# Altium PCB MiniRobot.PcbDoc
Units mil, origin at the board's own origin, x right, y up, seen from the top; angles counter-clockwise.
Board outline 3543.31 x 3346.46 mil, 2 copper layers (Top Layer, Bottom Layer); 51 components, 46 nets, 189 pads, 4 vias.
Unrouted connection lines stored in the file: 105.
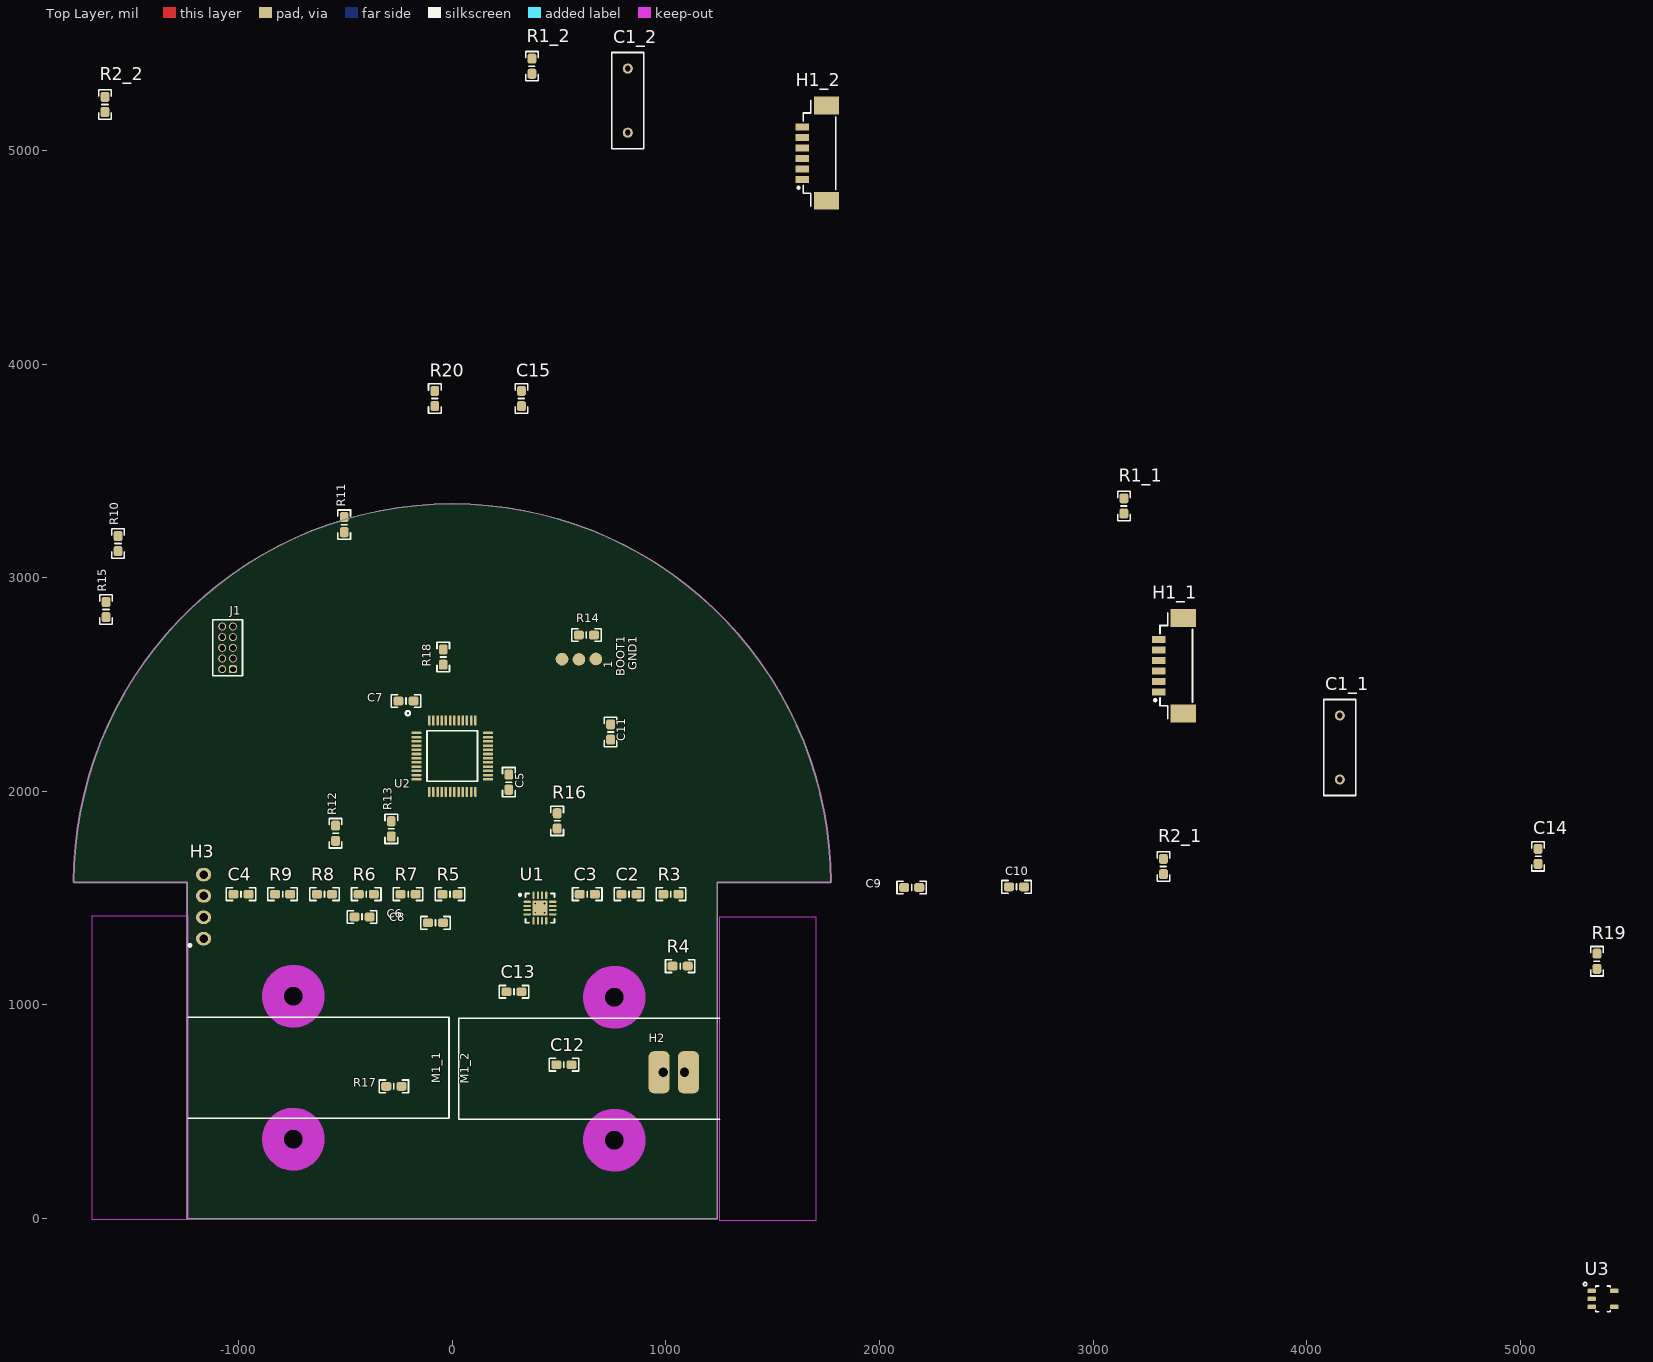
[diagram p0: Top Layer view]
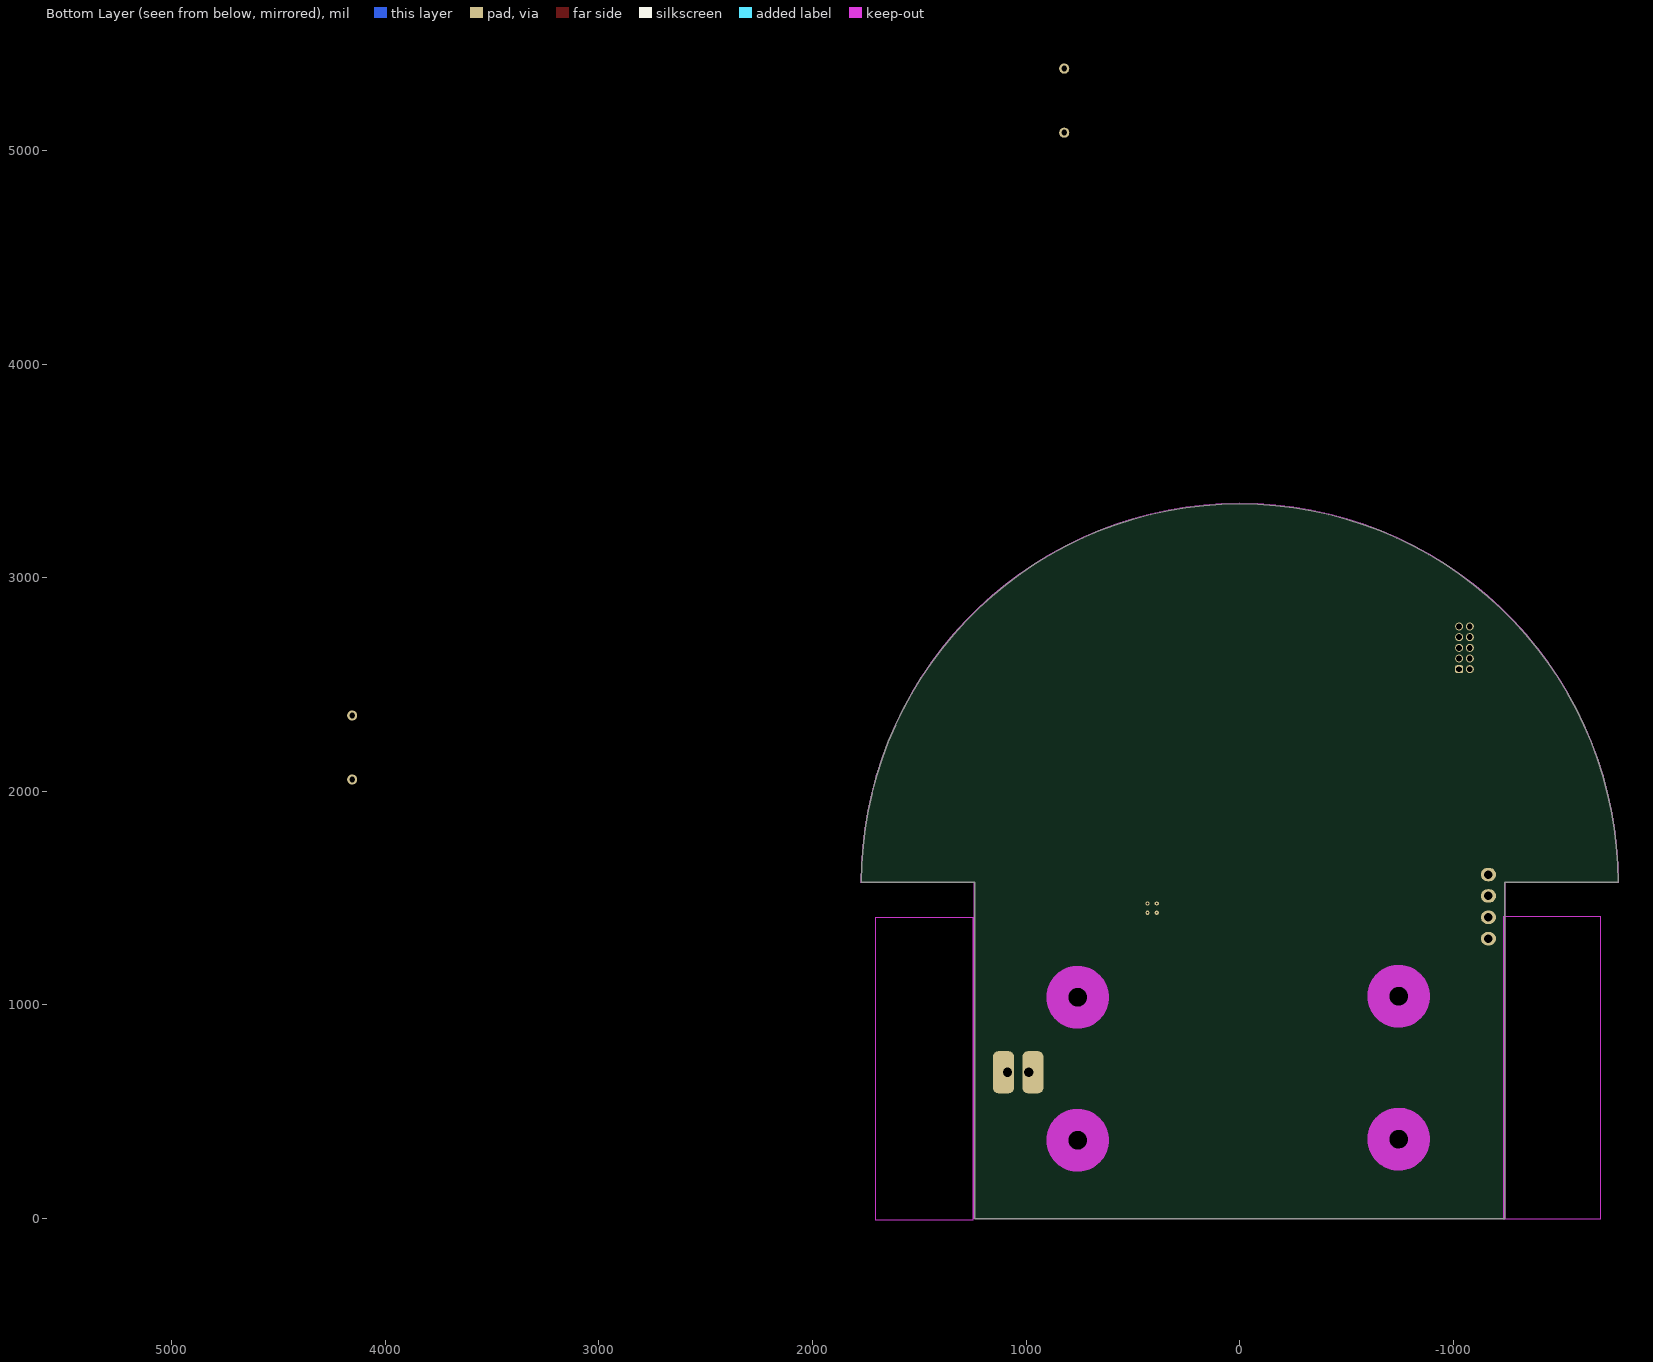
[diagram p1: Bottom Layer view, seen from below]

## Layer stack, top to bottom
Top Solder: solder mask 0.4, Solder Resist, Dk 3.5
Top Layer: signal copper 1.4
Dielectric 1: dielectric 12.6, FR-4, Dk 4.8
Bottom Layer: signal copper 1.4
Bottom Solder: solder mask 0.4, Solder Resist, Dk 3.5

## Board outline
1771.65,1574.8 1769.65,1659.1 1763.63,1743.21 1753.62,1826.94 1739.64,1910.09 1721.71,1992.49 1699.89,2073.94 1674.21,2154.25 1644.75,2233.26 1611.55,2310.77 1574.71,2386.62 1534.3,2460.63 1490.41,2532.63 1443.15,2602.46 1392.61,2669.97 1338.93,2734.99 1282.21,2797.38 1222.58,2857.01 1160.19,2913.73 1095.16,2967.42 1027.66,3017.95 957.83,3065.21 885.83,3109.1 811.82,3149.51 735.97,3186.36 658.46,3219.55 579.45,3249.02 499.13,3274.69 417.68,3296.52 335.29,3314.44 252.13,3328.42 168.41,3338.43 84.3,3344.45 0,3346.46 -84.3,3344.45 -168.41,3338.43 -252.13,3328.42 -335.29,3314.44 -417.68,3296.52 -499.13,3274.69 -579.45,3249.02 -658.46,3219.55 -735.97,3186.36 -811.82,3149.51 -885.83,3109.1 -957.83,3065.21 -1027.66,3017.95 -1095.16,2967.42 -1160.19,2913.73 -1222.58,2857.01 -1282.21,2797.38 -1338.93,2734.99 -1392.61,2669.97 -1443.15,2602.46 -1490.41,2532.63 -1534.3,2460.63 -1574.71,2386.62 -1611.55,2310.77 -1644.75,2233.26 -1674.21,2154.25 -1699.89,2073.94 -1721.71,1992.49 -1739.64,1910.09 -1753.62,1826.94 -1763.63,1743.21 -1769.65,1659.1 -1771.65,1574.8 -1240.16,1574.8 -1240.16,0 1240.16,0 1240.16,1574.8

## Design rules (kind name [scope] priority, off if disabled: settings)
Clearance [All] p1: gap=4.92
ComponentClearance [All] p1 off: gap=10 collisioncheckmode=3 verticalgap=10 showdistances=FALSE
HoleSize [All] p1: absolutevalues=TRUE maxlimit=393.7 minlimit=7.48 maxpercent=80.000 minpercent=20.000
MinimumAnnularRing [All] p1: minimumring=3.01
MinimumSolderMaskSliver [All] p1: minsoldermaskwidth=6.06
PolygonConnect [All] p1: connectstyle=Relief reliefconductorwidth=10 reliefentries=4 polygonreliefangle="45 Angle" airgapwidth=10
RoomDefinition U_MR_UartConnector [InComponentClass('U_MR_UartConnector')] p1: confinementstyle=ConfineIn formatcopy=TRUE lockcomponents=FALSE outline -121.06,3505.89 465.58,3505.89 465.58,4017.73 -121.06,4017.73
RoomDefinition U_MR_Power [InComponentClass('U_MR_Power')] p2: confinementstyle=ConfineIn formatcopy=TRUE lockcomponents=FALSE outline 4895.65,-445.87 5470.48,-445.87 5470.48,-189.95 4895.65,-189.95
RoomDefinition U_MR_Motor_Control [InComponentClass('U_MR_Motor_Control')] p3: confinementstyle=ConfineIn formatcopy=TRUE lockcomponents=FALSE outline -1067.95,1349.4 1102.44,1349.4 1102.44,1657.49 -1067.95,1657.49
RoutingVias [All] p1: holewidth=9.84 width=23.62 viastyle="Through Hole" minholewidth=7.87 minwidth=17.72 maxholewidth=39.37 maxwidth=78.74
SilkToSilkClearance [All] p1: silktosilkclearance=6.06
SilkToSolderMaskClearance [IsPad] p1: minsilkscreentomaskgap=0 clearancetoexposedcopper=TRUE
SolderMaskExpansion SolderMask_Via [IsVia] p1: expansion=-3937.01
SolderMaskExpansion [All] p2: expansion=4
Width [All] p1: maxlimit=393.7 minlimit=2.95 preferedwidth=7.87 minimp=50.000000 maximp=50.000000 favimp=50.000000
24 further rules are at their usual default settings.

## Classes and differential pairs
channel class MR_Motor: LeftMotor RightMotor
component class U_MR_Power: C9 C10 H2 U3
component class RightMotor: C1_2 H1_2 M1_2 R1_2 R2_2
component class LeftMotor: C1_1 H1_1 M1_1 R1_1 R2_1
component class U_MR_Mcu: 1 BOOT1 C5 C6 C7 C8 C9 C10 C11 GND1 J1 R10 R11 R13 R14 R15 R17 R18 R19 U3
component class U_MR_Motor_Control: C2 C3 C4 R3 R4 R5 R6 R7 R8 R9 U1
component class U_MR_RangeSensor: C14 R19
component class U_MR_UartConnector: C15 H2 R20

## Components (designator, comment, footprint, x,y, rotation, side; value= is the part's Value field where it differs from the comment)
1 "TestPoint" ROUND_TEST_POINT 513.78,2619.09 r180 top
BOOT1 "TestPoint" ROUND_TEST_POINT 593.01,2618.11 r270 top
C1_1 "0603" RAD-0.3 4155.51,2205.71 r90 top (schematic designator C1)
C1_2 "0603" RAD-0.3 821.85,5234.25 r90 top (schematic designator C1)
C2 "CerCap" 0603_CAP_LD 827.82,1518.7 r0 top
C3 "CerCap" 0603_CAP_LD 631.94,1518.7 r0 top
C4 "CerCap" 0603_CAP_LD -989.2,1518.7 r0 top
C5 "CerCap" 0603_CAP_LD 264.76,2043.31 r270 top
C6 "CerCap" 0603_CAP_LD -422.24,1412.4 r180 top
C7 "CerCap" 0603_CAP_LD -216.54,2423.23 r0 top
C8 "CerCap" 0603_CAP_LD -78.74,1384.84 r0 top
C9 "CerCap" 0603_CAP_LD 2150.89,1550.12 r0 top
C10 "CerCap" 0603_CAP_LD 2641.71,1553.15 r180 top
C11 "CerCap" 0603_CAP_LD 741.14,2278.54 r270 top
C12 "CerCap" 0603_CAP_LD 522.64,720.47 r0 top
C13 "CerCap" 0603_CAP_LD 289.37,1062.01 r0 top
C14 "CerCap" 0603_CAP_LD 5083.66,1695.87 r90 top
C15 "CerCap" 0603_CAP_LD 323.84,3839.57 r90 top
GND1 "TestPoint" ROUND_TEST_POINT 672.24,2620.08 r90 top
H1_1 "Header" HEADER_1X6_PICOBLADE_653106124022 3389.76,2588.58 r90 top (schematic designator H1)
H1_2 "Header" HEADER_1X6_PICOBLADE_653106124022 1719.49,4988.19 r90 top (schematic designator H1)
H2 "CustomBatteryConnector" CUSTOMBATTERYCONNECTOR 1037.4,685.04 r0 top
H3 "Header" "HE14 1x4 Straight" -1164.37,1460.63 r90 top
J1 "Debug" 62201021121 -1052.17,2672.24 r90 top
M1_1 "MotorGroup" MOTORGROUP -15.66,706.47 r0 top locked (schematic designator M1)
M1_2 "MotorGroup" MOTORGROUP 30.6,701.52 r180 top locked (schematic designator M1)
R1_1 "Resistor" 0603_RES_LD 3144.68,3336.61 r90 top (schematic designator R1)
R1_2 "Resistor" 0603_RES_LD 373.03,5395.67 r90 top (schematic designator R1)
R2_1 "Resistor" 0603_RES_LD 3329.72,1648.62 r90 top (schematic designator R2)
R2_2 "Resistor" 0603_RES_LD -1625.98,5216.54 r90 top (schematic designator R2)
R3 "Resistor" 0603_RES_LD 1023.69,1518.7 r0 top
R4 "Resistor" 0603_RES_LD 1066.93,1182.09 r0 top
R5 "Resistor" 0603_RES_LD -10.81,1518.7 r0 top
R6 "Resistor" 0603_RES_LD -402.56,1518.7 r0 top
R7 "Resistor" 0603_RES_LD -206.68,1518.7 r0 top
R8 "Resistor" 0603_RES_LD -598.43,1518.7 r0 top
R9 "Resistor" 0603_RES_LD -794.31,1518.7 r0 top
R10 "Resistor" 0603_RES_LD -1564.96,3160.43 r90 top
R11 "Resistor" 0603_RES_LD -505.91,3249.02 r90 top
R12 "Resistor" 0603_RES_LD -546.26,1804.13 r90 top
R13 "Resistor" 0603_RES_LD -285.43,1824.8 r90 top
R14 "Resistor" 0603_RES_LD 627.95,2732.28 r180 top
R15 "Resistor" 0603_RES_LD -1621.06,2851.38 r90 top
R16 "Resistor" 0603_RES_LD 491.14,1862.2 r90 top
R17 "Resistor" 0603_RES_LD -273.62,619.09 r0 top
R18 "Resistor" 0603_RES_LD -42.32,2628.94 r270 top
R19 "Resistor" 0603_RES_LD 5359.25,1204.72 r90 top
R20 "Resistor" 0603_RES_LD -81.69,3839.57 r90 top
U1 "Dual Brush Motor Driver" QFN-STSPIN240 410.47,1453.74 r0 top
U2 "Microcontroller" STM32_LQFP48 0,2165.35 r0 top
U3 "Low noise, Low Iq LDO" LP5907 5387.8,-375.98 r0 top

## Footprints (in the part's own frame and the unit in brackets; to place one, negate y for a bottom-side part, rotate by r counter-clockwise, add the part's x,y. Pads: shape width x height; smd on the part's side, far side on the other; paste and mask are expansions set on the pad)
0603_CAP_LD [mm] "0603 Capacitor Low Density"
  rrect50% 1.2x1.05 smd: 1(-0.9,0) 2(0.9,0)
  silkscreen extent -1.75,-0.75 1.75,0.75
0603_RES_LD [mm] "0603 Resistor Low Density"
  rrect50% 1.2x1.05 smd: 1(-0.9,0) 2(0.9,0)
  silkscreen extent -1.75,-0.75 1.75,0.75
62201021121 [mm] "Pin Header, pitch 1.27 mm, THT, Vertical, dual row, 10p"
  rrect50% 0.95x0.95 hole 0.7: 1(-2.54,-0.635)
  round 0.95 hole 0.7: 2(-2.54,0.635) 3(-1.27,-0.635) 4(-1.27,0.635) 5(0,-0.635) 6(0,0.635) 7(1.27,-0.635) 8(1.27,0.635) 9(2.54,-0.635) 10(2.54,0.635)
  silkscreen extent -3.32,-1.78 3.32,1.78, body extent -3.17,-1.7 3.18,1.7, height 5.33
CUSTOMBATTERYCONNECTOR [mm] "CustomBatteryConnector"
  rrect50% 2.5x5 smd paste-100: +(-1.75,0) -(1.75,0)
  rrect50% 2.5x5 smd far side paste-100: +(-1.75,0) -(1.75,0)
  round 1.5 hole 1.1 unplated paste-100: +(-1.27,0) -(1.27,0)
"HE14 1x4 Straight" [mm] "Connector HE14 Straight 1x4"
  oval 1.6x1.8 hole 1 mask+0.102: 1(-3.81,0) 2(-1.27,0) 3(1.27,0) 4(3.81,0)
  silkscreen extent -4.77,1.47 -4.45,1.78, body extent -5.08,-1.27 5.08,1.27, height 9.5
HEADER_1X6_PICOBLADE_653106124022 [mm] "1.25mm SMT Male Vertical Shrouded Header, 6p"
  rect 0.81x1.6 smd: 1(-3.125,2.07) 2(-1.875,2.07) 3(-0.625,2.07) 4(0.625,2.07) 5(1.875,2.07) 6(3.125,2.07)
  rect 2.1x3 smd: ""(-5.675,-0.83) ""(5.675,-0.83)
  silkscreen extent -6.27,-1.92 6.27,2.62
LP5907 [mm] "LP5907 SOT23"
  rrect50% 1x0.55 smd mask+0.102: 1(-1.35,0.95) 2(-1.35,0) 3(-1.35,-0.95) 4(1.35,-0.95) 5(1.35,0.95)
  silkscreen extent -2.33,-1.52 0.88,1.95
MOTORGROUP [mm]
  round 0 hole 2.2 unplated paste+0 mask+0: 21(-18.5,8.5) 22(-18.5,-8.5)
  Keep-Out Layer pour cut-out: -31,-18 -31,18 -42.5,18 -42.5,-18
  Keep-Out Layer circle w2.6: c-18.5,-8.5 r2.425
  Keep-Out Layer circle w2.6: c-18.5,8.5 r2.425
  silkscreen extent -31,-6 0,6
QFN-STSPIN240 [mm] "QFN, 16-Leads, Body 3,00x3,00mm, Pitch 0,50mm, Thermal Pad 1,80x1,80mm, IPC Low Density"
  oval 0.9x0.25 smd: 1(-1.525,0.75) 2(-1.525,0.25) 3(-1.525,-0.25) 4(-1.525,-0.75) 9(1.525,-0.75) 10(1.525,-0.25) 11(1.525,0.25) 12(1.525,0.75)
  oval 0.25x0.9 smd: 5(-0.75,-1.525) 6(-0.25,-1.525) 7(0.25,-1.525) 8(0.75,-1.525) 13(0.75,1.525) 14(0.25,1.525) 15(-0.25,1.525) 16(-0.75,1.525)
  rect 1.8x1.8 smd: 17(0,0)
  silkscreen extent -2.5,-1.73 1.73,1.73
RAD-0.3 [mm] "Radial Cap, Thru-Hole; 2 Leads; 0.3 in Pin Spacing"
  round 1.2 hole 0.7: 1(-3.81,0) 2(3.81,0)
  silkscreen extent -5.71,-1.91 5.71,1.91
ROUND_TEST_POINT [mm] "Small round test point"
  round 1.5 smd paste-100: 1(0,0)
STM32_LQFP48 [mm]
  rrect50% 1.2x0.3 smd: 1(-4.25,2.75) 2(-4.25,2.25) 3(-4.25,1.75) 4(-4.25,1.25) 5(-4.25,0.75) 6(-4.25,0.25) 7(-4.25,-0.25) 8(-4.25,-0.75) 9(-4.25,-1.25) 10(-4.25,-1.75) 11(-4.25,-2.25) 12(-4.25,-2.75) 25(4.25,-2.75) 26(4.25,-2.25) 27(4.25,-1.75) 28(4.25,-1.25) 29(4.25,-0.75) 30(4.25,-0.25) 31(4.25,0.25) 32(4.25,0.75) 33(4.25,1.25) 34(4.25,1.75) 35(4.25,2.25) 36(4.25,2.75)
  rrect50% 0.3x1.2 smd: 13(-2.75,-4.25) 14(-2.25,-4.25) 15(-1.75,-4.25) 16(-1.25,-4.25) 17(-0.75,-4.25) 18(-0.25,-4.25) 19(0.25,-4.25) 20(0.75,-4.25) 21(1.25,-4.25) 22(1.75,-4.25) 23(2.25,-4.25) 24(2.75,-4.25) 37(2.75,4.25) 38(2.25,4.25) 39(1.75,4.25) 40(1.25,4.25) 41(0.75,4.25) 42(0.25,4.25) 43(-0.25,4.25) 44(-0.75,4.25) 45(-1.25,4.25) 46(-1.75,4.25) 47(-2.25,4.25) 48(-2.75,4.25)
  silkscreen extent -5.54,-3 3,5.37

## Part data
C1_1 C1_2: library part Cap, "Capacitor"
C2 C3 C4 C5 C6 C7 C8 C9 C10 C11 C12 C13 C14 C15: "Ceramic Capacitor"
H1_1 H1_2: library part Header_6x1, "Header 6x1 Pins"
H2: library part BatteryConnector, "Custom Battery Connector"
H3: library part Header_4x1, "Header 4x1 PIns"
J1: library part Cortex_10x2, "Cortex 10 pins Debug Connector"
M1_1 M1_2: library part Motor
U1: library part STSPIN240, "ST Dual Motor Driver"
U2: library part STM32F303CBT6, "STM32F303 Microcontroller"
U3: library part LP5907, "LP5907 Low Noise Low Iq LDO"

## Via types
v1: diameter 19.68, hole 7.87, Top Layer to Bottom Layer, 4 vias

## Nets (pads, with @x,y where several pads share a name; then routed paths per layer and width w, separated by ;. In a path a pad name is that pad's centre, name@x,y a point inside that pad or via, vN(x,y) a via of type N, cw(c..) or ccw(c..) an arc to the next point about the centre after c; other vN are vias at no path point)
3V3: 1.1 C5.2 C6.2 C7.2 C8.2 C9.2 C10.2 C11.2 C13.2 C14.2 J1.1 R5.1 U2.1 U2.9 U2.24 U2.36 U2.48 U3.5
BOOT0: BOOT1.1 R14.2 U2.44
GND: C1_1.1 C1_2.1 C2.1 C3.1 C5.1 C6.1 C7.1 C8.1 C9.1 C10.1 C11.1 C12.1 C13.1 C14.1 C15.1 GND1.1 H1_1.2 H1_2.2 H2.- H3.2 J1.3 J1.5 J1.9 R4.2 R8.2 R14.1 U1.7 U2.8 U2.23 U2.35 U2.47 U3.2
MA_L: H1_1.1 U1.3
MA_R: H1_2.1 U1.10
MB_L: H1_1.6 U1.5
MB_R: H1_2.6 U1.8
NetC4_1: C4.1 R6.2
NetH1_1_3: H1_1.3 R1_1.2
NetH1_1_4: H1_1.4 R2_1.2
NetH1_2_3: H1_2.3 R1_2.2
NetH1_2_4: H1_2.4 R2_2.2
NetH3_3: H3.3 R20.2
NetH3_4: H3.4 U2.43
NetM2_2: R19.2
NetM2_3: R18.1
NetR1_1_1: R1_1.1 U2.10
NetR1_2_1: R1_2.1 U2.16
NetR2_1_1: R2_1.1 U2.11
NetR2_2_1: R2_2.1 U2.17
NetR4_1: R4.1 U1.4
NetR5_2: R5.2 R9.1 U1.11
NetR6_1: R6.1 R7.1 U1.12
NetR8_1: R8.1 U1.9
NetR10_1: R10.1 U1.2
NetR10_2: R10.2 U2.12
NetR11_1: R11.1 U1.16
NetR11_2: R11.2 U2.13
NetR12_1: R12.1 U1.1
NetR12_2: R12.2 U2.14
NetR13_1: R13.1 U1.15
NetR13_2: R13.2 U2.15
NetR15_1: R15.1 U1.14
NetR15_2: R15.2 U2.18
NetR16_2: R16.2 U2.19
NetR17_1: R17.1 R20.1
NetR17_2: R17.2 U2.42
NetR18_2: R18.2 U2.46
NetR19_1: R19.1 U2.45
NRST: J1.10 U2.7
OUT_B1: R3.2 R16.1
OUT_B2: C2.2 R3.1 U1.13 U2.20
SWCLK: J1.4 U2.37
SWDIO: J1.2 U2.34
SWO: J1.6 U2.39
VBATT: C1_1.2 C1_2.2 C3.2 C12.2 C15.2 H1_1.5 H1_2.5 H2.+ H3.1 U1.6 U3.1 U3.3
pads on no net: C4.2 H1_1. H1_2. J1.7 J1.8 M1_1.21 M1_1.22 M1_2.21 M1_2.22 R7.2 R9.2 U1.17 U2.2 U2.3 U2.4 U2.5 U2.6 U2.21 U2.22 U2.25 U2.26 U2.27 U2.28 U2.29 U2.30 U2.31 U2.32 U2.33 U2.38 U2.40 U2.41 U3.4
copper on no net:
  other v1: 388.82,1432.08 432.13,1432.08 388.82,1475.39 432.13,1475.39

## Keep-outs
Keep-Out Layer:
  lines w3.94: 1771.62,1659.1 ccw(c1769.65,1659.1) 1771.62,1659.14 ; -1773.62,1574.85 ccw(c-1771.65,1574.8) -1771.65,1572.83 ; -1773.62,1574.86 ccw(c-1771.65,1574.8) -1771.65,1572.83 ; -1773.62,1574.86 -1771.62,1659.14 ; -1773.62,1574.85 -1773.62,1574.86 ; -1771.65,1572.83 -1242.13,1572.83 -1242.13,0 ; -1771.62,1659.15 cw(c-1769.65,1659.1) -1771.61,1659.24 ; -1771.62,1659.14 cw(c-1769.65,1659.1) -1771.61,1659.24 ; -1771.62,1659.14 -1771.62,1659.15 ; -1771.61,1659.24 -1765.6,1743.35 ; -1765.6,1743.35 cw(c-1763.63,1743.21) -1765.59,1743.44 ; -1765.6,1743.35 cw(c-1763.63,1743.21) -1765.59,1743.44 ; -1765.59,1743.44 -1755.58,1827.17 ; -1755.58,1827.17 cw(c-1753.62,1826.94) -1755.56,1827.27 ; -1755.58,1827.17 cw(c-1753.62,1826.94) -1755.56,1827.26 ; -1755.56,1827.27 -1741.58,1910.41 ; -1755.56,1827.26 -1755.56,1827.27 ; -1741.58,1910.42 cw(c-1739.64,1910.09) -1741.56,1910.51 ; -1741.58,1910.41 cw(c-1739.64,1910.09) -1741.56,1910.51 ; -1741.58,1910.41 -1741.58,1910.42 ; -1741.56,1910.51 ccw(c-1739.64,1910.09) -1741.56,1910.51 ; -1741.56,1910.51 -1723.64,1992.9 ; -1741.56,1910.51 -1741.56,1910.51 ; -1741.56,1910.51 -1741.56,1910.51 ; -1723.64,1992.9 cw(c-1721.71,1992.49) -1723.62,1992.99 ; -1723.64,1992.91 ccw(c-1721.71,1992.49) -1723.64,1992.9 ; -1723.64,1992.91 cw(c-1721.71,1992.49) -1723.62,1993 ; -1723.64,1992.9 -1723.64,1992.91 ; -1723.64,1992.9 -1723.64,1992.9 ; -1723.62,1993 ccw(c-1721.71,1992.49) -1723.62,1992.99 ; -1723.62,1993 -1701.79,2074.44 ; -1723.62,1993 -1723.62,1993 ; -1723.62,1992.99 -1723.62,1993 ; -1701.79,2074.45 cw(c-1699.89,2073.94) -1701.77,2074.53 ; -1701.79,2074.45 ccw(c-1699.89,2073.94) -1701.79,2074.44 ; -1701.79,2074.45 cw(c-1699.89,2073.94) -1701.77,2074.53 ; -1701.79,2074.44 -1701.79,2074.45 ; -1701.79,2074.44 -1701.79,2074.44 ; -1701.77,2074.53 -1676.09,2154.85 ; -1676.09,2154.85 cw(c-1674.21,2154.25) -1676.06,2154.94 ; -1676.09,2154.85 cw(c-1674.21,2154.25) -1676.06,2154.94 ; -1676.06,2154.95 ccw(c-1674.21,2154.25) -1676.06,2154.94 ; -1676.06,2154.95 -1646.59,2233.94 ; -1676.06,2154.94 -1676.06,2154.95 ; -1676.06,2154.94 -1676.06,2154.94 ; -1646.59,2233.95 cw(c-1644.75,2233.26) -1646.56,2234.04 ; -1646.59,2233.95 ccw(c-1644.75,2233.26) -1646.59,2233.94 ; -1646.59,2233.95 cw(c-1644.75,2233.26) -1646.56,2234.04 ; -1646.59,2233.95 -1646.59,2233.95 ; -1646.59,2233.94 -1646.59,2233.95 ; -1646.56,2234.04 -1613.36,2311.55 ; -1613.36,2311.55 cw(c-1611.55,2310.77) -1613.33,2311.63 ; -1613.36,2311.55 cw(c-1611.55,2310.77) -1613.32,2311.63 ; -1613.33,2311.63 cw(c-1611.55,2310.77) -1613.32,2311.64 ; -1613.33,2311.63 -1613.32,2311.63 ; -1613.32,2311.64 -1576.48,2387.47 ; -1613.32,2311.63 -1613.32,2311.64 ; -1576.48,2387.48 cw(c-1574.71,2386.62) -1576.44,2387.57 ; -1576.48,2387.47 cw(c-1574.71,2386.62) -1576.48,2387.49 ; -1576.48,2387.48 -1576.48,2387.49 ; -1576.48,2387.47 -1576.48,2387.48 ; -1576.48,2387.49 cw(c-1574.71,2386.62) -1576.44,2387.57 ; -1576.44,2387.57 -1536.03,2461.57 ; -1536.03,2461.57 cw(c-1534.3,2460.63) -1535.98,2461.65 ; -1536.03,2461.57 cw(c-1534.3,2460.63) -1535.98,2461.65 ; -1535.98,2461.65 -1492.09,2533.66 ; -1492.09,2533.66 cw(c-1490.41,2532.63) -1492.03,2533.75 ; -1492.09,2533.66 cw(c-1490.41,2532.63) -1492.04,2533.74 ; -1492.03,2533.75 -1444.79,2603.56 ; -1492.04,2533.73 -1492.03,2533.75 ; -1444.78,2603.57 cw(c-1443.15,2602.46) -1444.72,2603.64 ; -1444.79,2603.56 cw(c-1443.15,2602.46) -1444.72,2603.64 ; -1444.79,2603.56 -1444.78,2603.57 ; -1444.72,2603.64 -1394.19,2671.15 ; -1394.19,2671.15 cw(c-1392.61,2669.97) -1394.13,2671.22 ; -1394.19,2671.15 cw(c-1392.61,2669.97) -1394.13,2671.22 ; -1394.13,2671.22 -1340.45,2736.24 ; -1340.45,2736.24 cw(c-1338.93,2734.99) -1340.39,2736.31 ; -1340.45,2736.24 cw(c-1338.93,2734.99) -1340.38,2736.31 ; -1340.38,2736.32 ccw(c-1338.93,2734.99) -1340.39,2736.31 ; -1340.38,2736.32 -1283.67,2798.7 ; -1340.38,2736.31 -1340.38,2736.32 ; -1340.39,2736.31 -1340.38,2736.31 ; -1283.66,2798.71 cw(c-1282.21,2797.38) -1283.6,2798.78 ; -1283.66,2798.72 ccw(c-1282.21,2797.38) -1283.67,2798.7 ; -1283.66,2798.72 cw(c-1282.21,2797.38) -1283.6,2798.78 ; -1283.66,2798.71 -1283.66,2798.72 ; -1283.67,2798.7 -1283.66,2798.71 ; -1283.6,2798.78 -1223.97,2858.4 ; -1242.13,0 ccw(c-1240.16,0) -1240.16,-1.97 ; -1242.13,0 ccw(c-1240.16,0) -1240.16,-1.97 ; -1240.16,-1.97 1240.16,-1.97 ; -1223.97,2858.4 cw(c-1222.58,2857.01) -1223.91,2858.46 ; -1223.97,2858.4 cw(c-1222.58,2857.01) -1223.91,2858.47 ; -1223.9,2858.47 ccw(c-1222.58,2857.01) -1223.91,2858.46 ; -1223.9,2858.47 -1161.52,2915.18 ; -1223.91,2858.47 -1223.9,2858.47 ; -1223.91,2858.46 -1223.91,2858.47 ; -1161.52,2915.18 cw(c-1160.19,2913.73) -1161.5,2915.19 ; -1161.52,2915.18 -1161.51,2915.19 ; -1161.51,2915.19 cw(c-1160.19,2913.73) -1161.44,2915.25 ; -1161.5,2915.19 cw(c-1160.19,2913.73) -1161.44,2915.25 ; -1161.51,2915.19 -1161.5,2915.19 ; -1161.44,2915.25 -1096.42,2968.94 ; -1096.42,2968.94 cw(c-1095.16,2967.42) -1096.34,2968.99 ; -1096.42,2968.94 cw(c-1095.16,2967.42) -1096.34,2968.99 ; -1096.34,2968.99 -1028.84,3019.53 ; -1028.84,3019.53 cw(c-1027.66,3017.95) -1028.75,3019.59 ; -1028.84,3019.53 cw(c-1027.66,3017.95) -1028.76,3019.58 -1028.75,3019.59 ; -1028.75,3019.59 -958.94,3066.84 ; -958.93,3066.84 cw(c-957.83,3065.21) -958.85,3066.89 ; -958.94,3066.84 cw(c-957.83,3065.21) -958.85,3066.89 ; -958.94,3066.84 -958.93,3066.84 ; -958.85,3066.89 -886.85,3110.78 ; -886.85,3110.78 cw(c-885.83,3109.1) -886.77,3110.83 ; -886.85,3110.78 cw(c-885.83,3109.1) -886.77,3110.83 ; -886.77,3110.83 -812.76,3151.24 ; -812.76,3151.24 cw(c-811.82,3149.51) -812.69,3151.28 ; -812.76,3151.24 cw(c-811.82,3149.51) -812.68,3151.28 ; -812.69,3151.28 cw(c-811.82,3149.51) -812.67,3151.29 ; -812.68,3151.28 -812.67,3151.29 ; -812.69,3151.28 -812.68,3151.28 ; -812.67,3151.29 -736.84,3188.12 ; -736.83,3188.13 cw(c-735.97,3186.36) -736.75,3188.17 ; -736.82,3188.13 ccw(c-735.97,3186.36) -736.84,3188.12 ; -736.82,3188.13 cw(c-735.97,3186.36) -736.75,3188.17 ; -736.83,3188.13 -736.82,3188.13 ; -736.84,3188.12 -736.83,3188.13 ; -736.75,3188.17 -659.23,3221.36 ; -659.23,3221.36 cw(c-658.46,3219.55) -659.15,3221.39 ; -659.23,3221.36 cw(c-658.46,3219.55) -659.15,3221.39 ; -659.15,3221.39 cw(c-658.46,3219.55) -659.14,3221.4 ; -659.15,3221.39 -659.14,3221.4 ; -659.15,3221.39 -659.15,3221.39 ; -659.14,3221.4 -580.15,3250.86 ; -580.15,3250.86 cw(c-579.45,3249.02) -580.13,3250.86 ; -580.15,3250.86 -580.14,3250.86 ; -580.14,3250.86 cw(c-579.45,3249.02) -580.05,3250.89 ; -580.13,3250.86 cw(c-579.45,3249.02) -580.05,3250.89 ; -580.14,3250.86 -580.13,3250.86 ; -580.05,3250.89 -499.73,3276.57 ; -499.73,3276.57 cw(c-499.13,3274.69) -499.65,3276.59 ; -499.73,3276.57 cw(c-499.13,3274.69) -499.64,3276.59 ; -499.65,3276.59 cw(c-499.13,3274.69) -499.64,3276.6 ; -499.65,3276.59 -499.64,3276.59 ; -499.64,3276.6 -418.2,3298.42 ; -499.64,3276.59 -499.64,3276.6 ; -418.2,3298.42 cw(c-417.68,3296.52) -418.19,3298.42 ; -418.2,3298.42 -418.19,3298.42 ; -418.19,3298.42 cw(c-417.68,3296.52) -418.1,3298.44 ; -418.19,3298.42 cw(c-417.68,3296.52) -418.1,3298.44 ; -418.19,3298.42 -418.19,3298.42 ; -418.1,3298.44 -335.71,3316.37 ; -335.71,3316.37 cw(c-335.29,3314.44) -335.6,3316.38 ; -335.71,3316.37 cw(c-335.29,3314.44) -335.62,3316.38 -335.6,3316.38 ; -335.6,3316.38 -252.47,3330.36 ; -252.46,3330.37 cw(c-252.13,3328.42) -252.37,3330.38 ; -252.47,3330.36 cw(c-252.13,3328.42) -252.37,3330.38 ; -252.47,3330.36 -252.46,3330.37 ; -252.37,3330.38 -168.64,3340.39 ; -168.64,3340.39 cw(c-168.41,3338.43) -168.55,3340.4 ; -168.64,3340.39 cw(c-168.41,3338.43) -168.55,3340.4 ; -168.55,3340.4 -84.44,3346.41 ; -84.44,3346.41 cw(c-84.3,3344.45) -84.33,3346.42 ; -84.44,3346.41 cw(c-84.3,3344.45) -84.35,3346.42 -84.33,3346.42 ; -84.33,3346.42 -0.06,3348.43 ; -0.05,3348.43 cw(c0,3346.46) 0.06,3348.43 ; -0.06,3348.43 cw(c0,3346.46) 0.05,3348.43 0.06,3348.43 ; -0.06,3348.43 -0.05,3348.43 ; 0.06,3348.43 84.33,3346.42 ; 84.33,3346.42 cw(c84.3,3344.45) 84.44,3346.41 ; 84.34,3346.42 cw(c84.3,3344.45) 84.44,3346.41 ; 84.33,3346.42 84.34,3346.42 ; 84.44,3346.41 168.55,3340.4 ; 168.55,3340.4 cw(c168.41,3338.43) 168.64,3340.39 ; 168.55,3340.4 cw(c168.41,3338.43) 168.64,3340.39 ; 168.64,3340.39 252.37,3330.38 ; 252.37,3330.38 cw(c252.13,3328.42) 252.47,3330.36 ; 252.37,3330.38 cw(c252.13,3328.42) 252.46,3330.37 ; 252.47,3330.36 335.6,3316.38 ; 252.46,3330.37 252.47,3330.36 ; 335.6,3316.38 cw(c335.29,3314.44) 335.71,3316.37 ; 335.6,3316.38 335.61,3316.38 cw(c335.29,3314.44) 335.7,3316.37 ; 335.7,3316.37 cw(c335.29,3314.44) 335.71,3316.36 ; 335.7,3316.37 335.71,3316.37 ; 335.71,3316.36 418.1,3298.44 ; 335.71,3316.37 335.71,3316.36 ; 418.1,3298.44 cw(c417.68,3296.52) 418.19,3298.42 ; 418.1,3298.44 ccw(c417.68,3296.52) 418.1,3298.44 ; 418.1,3298.44 cw(c417.68,3296.52) 418.19,3298.42 ; 418.1,3298.44 418.1,3298.44 ; 418.1,3298.44 418.1,3298.44 ; 418.2,3298.42 ccw(c417.68,3296.52) 418.19,3298.42 ; 418.2,3298.42 499.64,3276.6 ; 418.19,3298.42 418.2,3298.42 ; 418.19,3298.42 418.19,3298.42 ; 499.64,3276.59 cw(c499.13,3274.69) 499.73,3276.57 ; 499.64,3276.59 ccw(c499.13,3274.69) 499.64,3276.6 ; 499.64,3276.59 cw(c499.13,3274.69) 499.73,3276.57 ; 499.64,3276.59 499.64,3276.59 ; 499.64,3276.6 499.64,3276.59 ; 499.73,3276.57 580.05,3250.89 ; 580.05,3250.89 cw(c579.45,3249.02) 580.13,3250.87 ; 580.05,3250.89 cw(c579.45,3249.02) 580.14,3250.86 ; 580.14,3250.86 ccw(c579.45,3249.02) 580.13,3250.87 ; 580.14,3250.86 659.14,3221.4 ; 580.14,3250.86 580.14,3250.86 ; 580.13,3250.87 580.14,3250.86 ; 659.14,3221.39 cw(c658.46,3219.55) 659.23,3221.36 ; 659.15,3221.39 ccw(c658.46,3219.55) 659.14,3221.4 ; 659.15,3221.39 cw(c658.46,3219.55) 659.23,3221.36 ; 659.14,3221.39 659.15,3221.39 ; 659.14,3221.4 659.14,3221.39 ; 659.23,3221.36 736.75,3188.17 ; 736.75,3188.17 cw(c735.97,3186.36) 736.82,3188.13 ; 736.75,3188.17 cw(c735.97,3186.36) 736.83,3188.13 ; 736.84,3188.12 ccw(c735.97,3186.36) 736.82,3188.13 ; 736.84,3188.12 812.67,3151.29 ; 736.83,3188.13 736.84,3188.12 ; 736.82,3188.13 736.83,3188.13 ; 812.69,3151.28 ccw(c811.82,3149.51) 812.67,3151.29 ; 812.69,3151.28 cw(c811.82,3149.51) 812.76,3151.24 ; 812.69,3151.28 812.68,3151.28 ; 812.68,3151.28 cw(c811.82,3149.51) 812.76,3151.24 ; 812.67,3151.29 812.68,3151.28 ; 812.76,3151.24 886.77,3110.83 ; 886.77,3110.83 cw(c885.83,3109.1) 886.85,3110.78 ; 886.77,3110.83 cw(c885.83,3109.1) 886.85,3110.78 ; 886.85,3110.78 958.85,3066.89 ; 958.85,3066.89 cw(c957.83,3065.21) 958.93,3066.84 ; 958.85,3066.89 cw(c957.83,3065.21) 958.94,3066.84 ; 958.94,3066.84 1028.75,3019.59 ; 958.93,3066.84 958.94,3066.84 ; 1028.75,3019.59 cw(c1027.66,3017.95) 1028.84,3019.53 ; 1028.75,3019.59 1028.76,3019.58 cw(c1027.66,3017.95) 1028.84,3019.53 ; 1028.84,3019.53 1096.34,2968.99 ; 1096.34,2968.99 cw(c1095.16,2967.42) 1096.42,2968.94 ; 1096.34,2968.99 cw(c1095.16,2967.42) 1096.42,2968.94 ; 1096.42,2968.94 1161.44,2915.25 ; 1161.44,2915.25 cw(c1160.19,2913.73) 1161.5,2915.19 ; 1161.44,2915.25 cw(c1160.19,2913.73) 1161.51,2915.19 ; 1161.5,2915.19 cw(c1160.19,2913.73) 1161.52,2915.18 ; 1161.5,2915.19 1161.51,2915.19 ; 1161.52,2915.18 1223.9,2858.47 ; 1161.52,2915.18 1161.51,2915.19 ; 1223.9,2858.47 cw(c1222.58,2857.01) 1223.91,2858.46 ; 1223.9,2858.47 1223.91,2858.47 ; 1223.91,2858.47 cw(c1222.58,2857.01) 1223.97,2858.4 ; 1223.91,2858.46 cw(c1222.58,2857.01) 1223.97,2858.4 ; 1223.91,2858.47 1223.91,2858.46 ; 1223.97,2858.4 1283.6,2798.78 ; 1240.16,-1.97 ccw(c1240.16,0) 1242.13,0 ; 1240.16,-1.97 ccw(c1240.16,0) 1242.13,0 ; 1242.13,0 1242.13,1572.83 1771.65,1572.83 ; 1283.6,2798.78 cw(c1282.21,2797.38) 1283.66,2798.72 ; 1283.6,2798.78 cw(c1282.21,2797.38) 1283.66,2798.71 ; 1283.67,2798.7 ccw(c1282.21,2797.38) 1283.66,2798.72 ; 1283.66,2798.72 1283.66,2798.71 ; 1283.66,2798.71 1283.67,2798.7 ; 1283.67,2798.7 1340.38,2736.32 ; 1340.38,2736.31 cw(c1338.93,2734.99) 1340.44,2736.24 ; 1340.39,2736.31 ccw(c1338.93,2734.99) 1340.38,2736.32 ; 1340.39,2736.31 cw(c1338.93,2734.99) 1340.44,2736.24 ; 1340.38,2736.32 1340.38,2736.31 ; 1340.38,2736.31 1340.39,2736.31 ; 1340.44,2736.24 1394.13,2671.22 ; 1394.13,2671.22 cw(c1392.61,2669.97) 1394.19,2671.15 ; 1394.13,2671.22 cw(c1392.61,2669.97) 1394.19,2671.15 ; 1394.19,2671.15 1444.72,2603.64 ; 1444.72,2603.64 cw(c1443.15,2602.46) 1444.78,2603.56 ; 1444.72,2603.64 cw(c1443.15,2602.46) 1444.78,2603.57 ; 1444.78,2603.57 1444.78,2603.56 ; 1444.78,2603.56 1492.03,2533.75 ; 1492.03,2533.75 cw(c1490.41,2532.63) 1492.09,2533.66 ; 1492.04,2533.74 cw(c1490.41,2532.63) 1492.09,2533.66 ; 1492.03,2533.75 1492.04,2533.74 ; 1492.09,2533.66 1535.98,2461.66 ; 1535.98,2461.66 cw(c1534.3,2460.63) 1536.02,2461.57 ; 1535.98,2461.66 cw(c1534.3,2460.63) 1536.02,2461.57 ; 1536.02,2461.57 1576.44,2387.57 ; 1576.44,2387.57 cw(c1574.71,2386.62) 1576.47,2387.49 ; 1576.44,2387.57 cw(c1574.71,2386.62) 1576.48,2387.48 ; 1576.48,2387.47 ccw(c1574.71,2386.62) 1576.47,2387.49 ; 1576.48,2387.48 1576.47,2387.49 ; 1576.48,2387.48 1576.48,2387.47 ; 1576.48,2387.47 1613.32,2311.64 ; 1613.33,2311.63 ccw(c1611.55,2310.77) 1613.32,2311.64 ; 1613.33,2311.63 cw(c1611.55,2310.77) 1613.36,2311.55 ; 1613.33,2311.63 1613.32,2311.64 ; 1613.32,2311.64 cw(c1611.55,2310.77) 1613.36,2311.55 ; 1613.32,2311.64 1613.32,2311.64 ; 1613.36,2311.55 1646.56,2234.04 ; 1646.59,2233.95 ccw(c1644.75,2233.26) 1646.56,2234.04 ; 1646.59,2233.94 ccw(c1644.75,2233.26) 1646.59,2233.95 ; 1646.59,2233.95 ccw(c1644.75,2233.26) 1646.56,2234.04 ; 1646.59,2233.95 1646.59,2233.95 ; 1646.59,2233.95 1646.59,2233.94 ; 1646.59,2233.94 1676.06,2154.95 ; 1676.09,2154.85 ccw(c1674.21,2154.25) 1676.06,2154.94 ; 1676.09,2154.85 ccw(c1674.21,2154.25) 1676.06,2154.94 ; 1676.09,2154.85 1701.77,2074.54 ; 1676.06,2154.94 ccw(c1674.21,2154.25) 1676.06,2154.95 ; 1676.06,2154.95 1676.06,2154.94 ; 1676.06,2154.94 1676.06,2154.94 ; 1701.79,2074.45 ccw(c1699.89,2073.94) 1701.77,2074.54 ; 1701.79,2074.44 ccw(c1699.89,2073.94) 1701.79,2074.45 ; 1701.79,2074.45 ccw(c1699.89,2073.94) 1701.77,2074.54 ; 1701.79,2074.45 1701.79,2074.45 ; 1701.79,2074.45 1701.79,2074.44 ; 1701.79,2074.44 1723.61,1993 ; 1723.64,1992.91 ccw(c1721.71,1992.49) 1723.62,1993 ; 1723.64,1992.9 ccw(c1721.71,1992.49) 1723.64,1992.91 ; 1723.64,1992.91 ccw(c1721.71,1992.49) 1723.62,1992.99 ; 1723.64,1992.91 1723.64,1992.91 ; 1723.64,1992.91 1723.64,1992.9 ; 1723.64,1992.9 1741.56,1910.51 ; 1723.62,1992.99 ccw(c1721.71,1992.49) 1723.61,1993 ; 1723.61,1993 1723.62,1993 ; 1723.62,1993 1723.62,1992.99 ; 1741.58,1910.41 ccw(c1739.64,1910.09) 1741.56,1910.51 ; 1741.58,1910.42 ccw(c1739.64,1910.09) 1741.56,1910.51 ; 1741.58,1910.42 1741.58,1910.41 ; 1741.58,1910.41 1755.56,1827.27 ; 1741.56,1910.51 ccw(c1739.64,1910.09) 1741.56,1910.51 ; 1741.56,1910.51 1741.56,1910.51 ; 1741.56,1910.51 1741.56,1910.51 ; 1755.58,1827.17 ccw(c1753.62,1826.94) 1755.56,1827.26 ; 1755.58,1827.17 ccw(c1753.62,1826.94) 1755.56,1827.27 ; 1755.58,1827.17 1765.59,1743.44 ; 1755.56,1827.27 1755.56,1827.26 ; 1765.6,1743.35 ccw(c1763.63,1743.21) 1765.59,1743.44 ; 1765.6,1743.35 ccw(c1763.63,1743.21) 1765.59,1743.44 ; 1765.6,1743.35 1771.61,1659.24 ; 1771.65,1572.83 ccw(c1771.65,1574.8) 1773.62,1574.8 ; 1771.65,1572.83 ccw(c1771.65,1574.8) 1773.62,1574.8 ; 1771.62,1659.14 ccw(c1769.65,1659.1) 1771.61,1659.24 ; 1771.61,1659.15 ccw(c1769.65,1659.1) 1771.61,1659.24 ; 1771.61,1659.15 1771.62,1659.14 ; 1771.62,1659.14 1773.62,1574.86 ; 1773.62,1574.8 ccw(c1771.65,1574.8) 1773.62,1574.85 ; 1773.62,1574.8 ccw(c1771.65,1574.8) 1773.62,1574.86 ; 1773.62,1574.86 1773.62,1574.85

## Silkscreen, mask and mechanical layers (free items; w line width, h text height)
Mechanical 1:
  the board outline again, w7.87